# EAGLE board Triple_Axis_Accel-Gyro_Breakout_MPU-6050-Panel-v12 (EAGLE 6.4), part 1 of 3
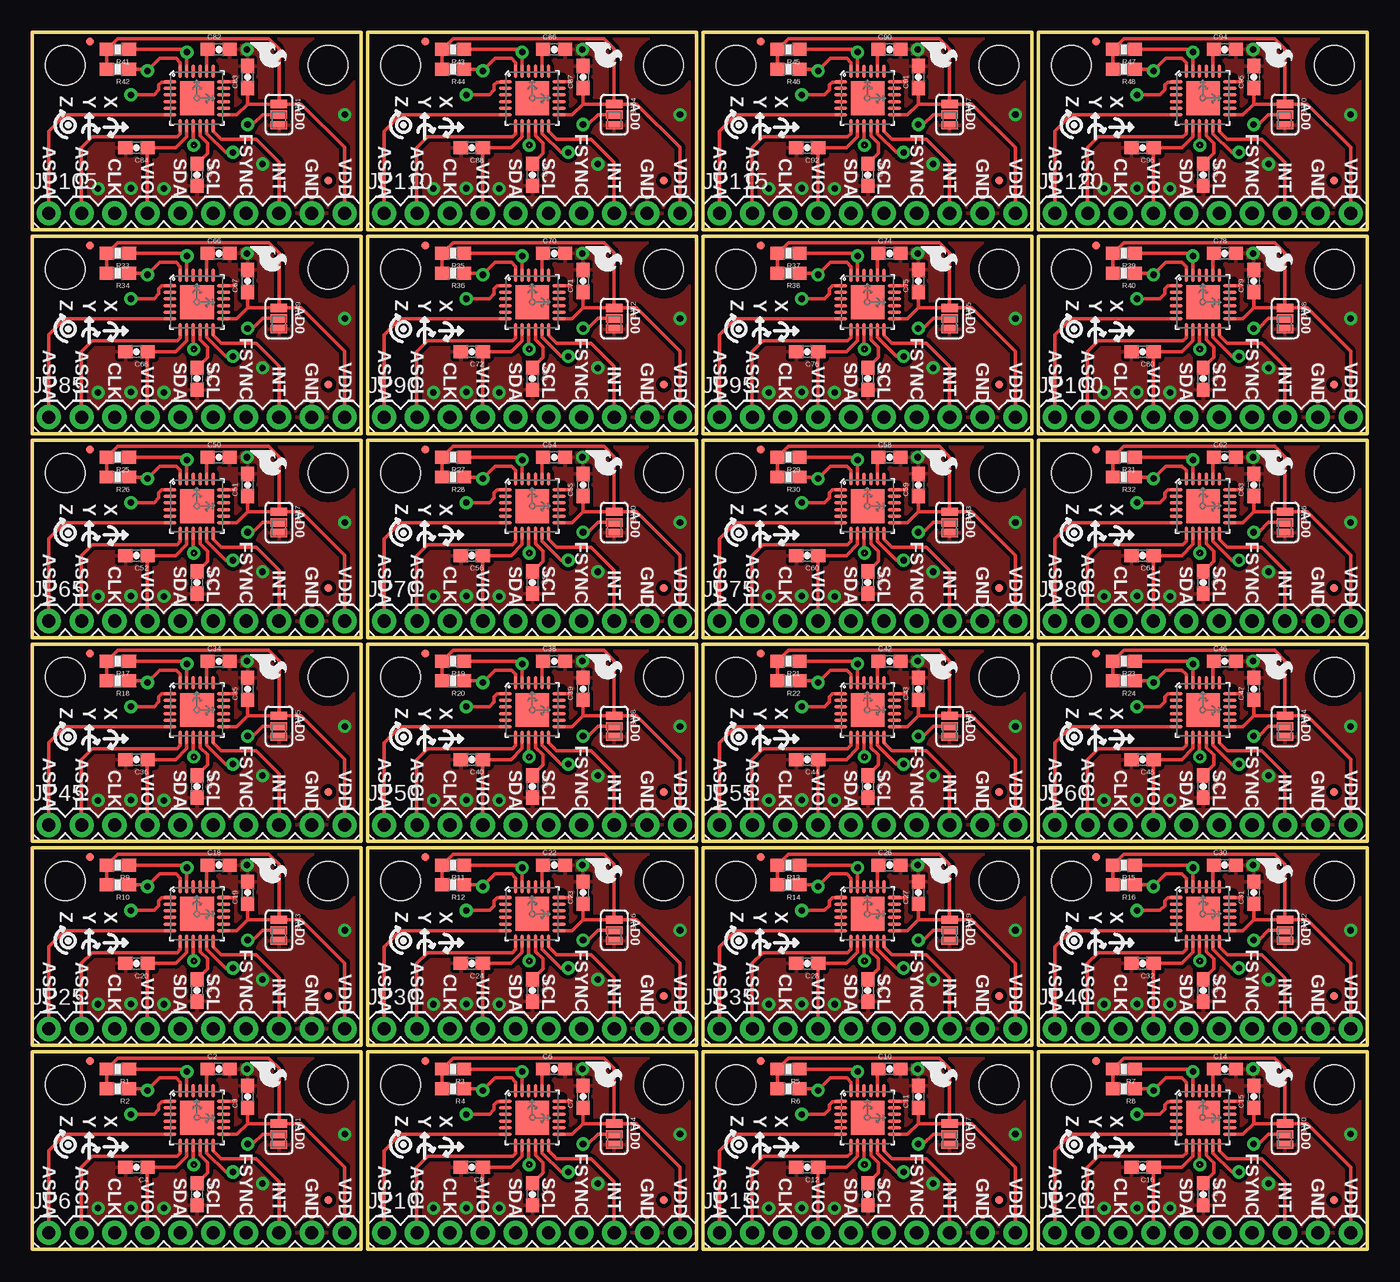
[diagram p0: board, top side]
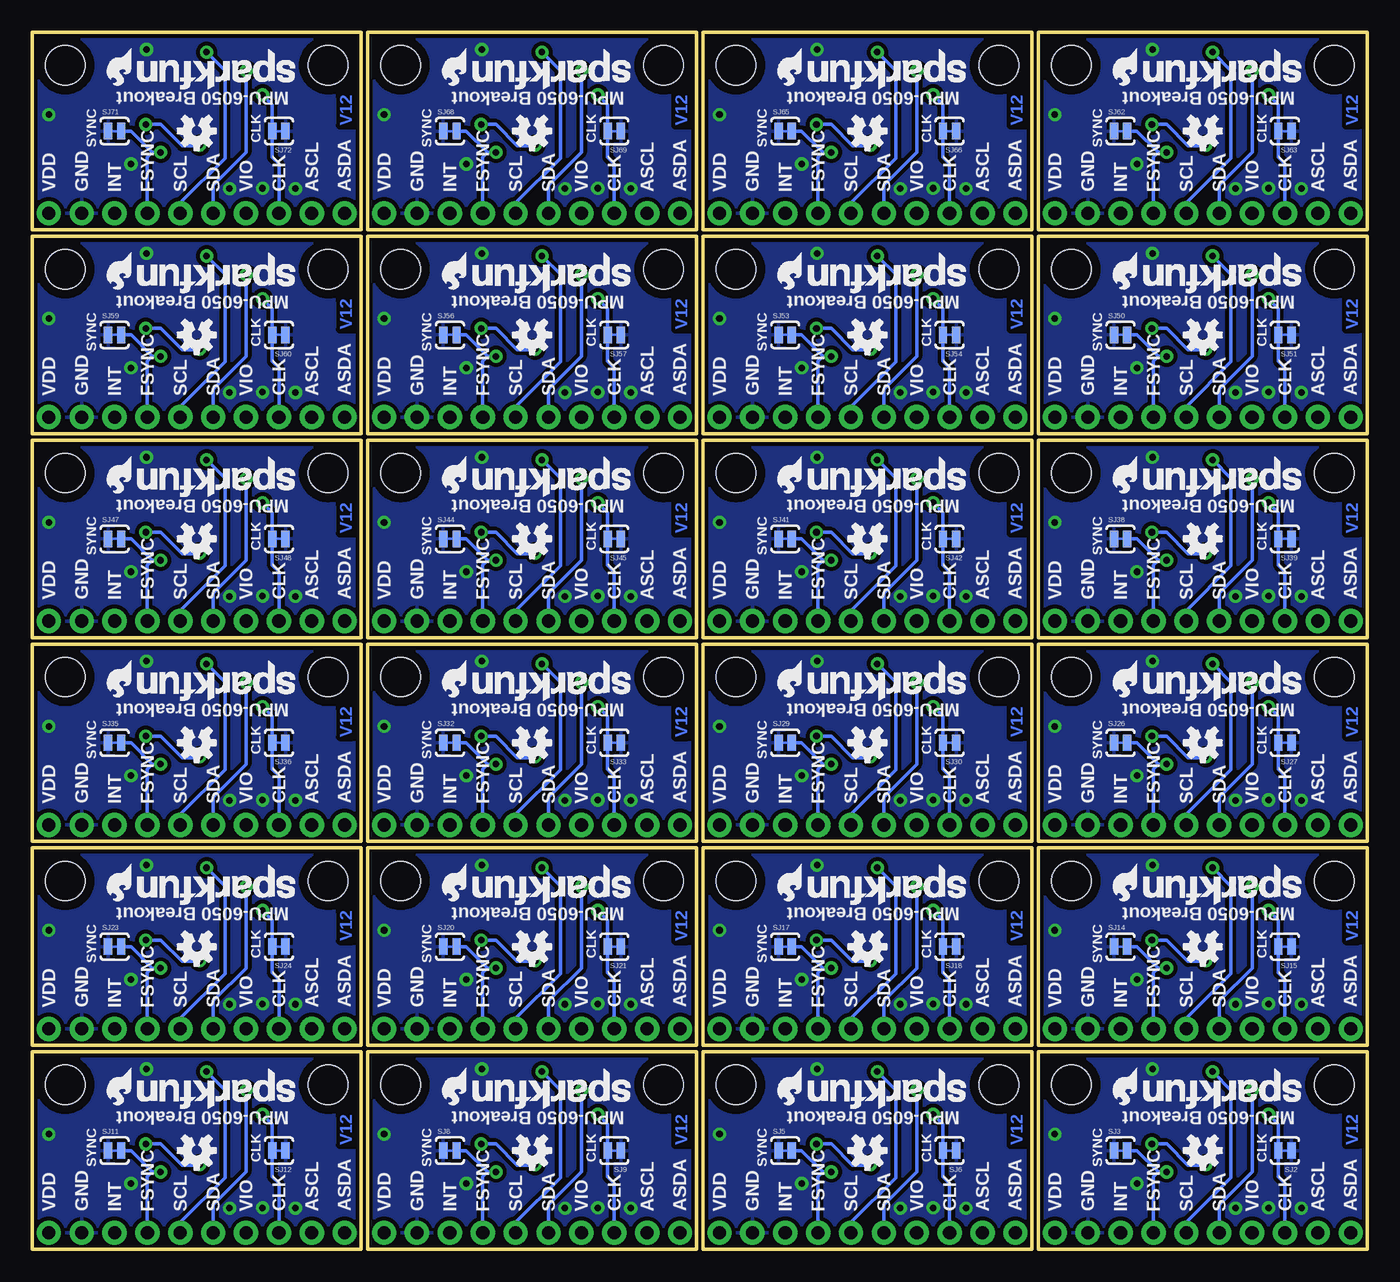
[diagram p1: board, bottom side, seen from below]

Size 103.12 x 93.98 mm. Coordinates in mm from the lower left corner, seen from the top.
Outline: 25.4,0 25.4,15.24 0,15.24 0,0 25.4,0
Outline: 51.31,0 51.31,15.24 25.91,15.24 25.91,0 51.31,0
Outline: 77.22,0 77.22,15.24 51.82,15.24 51.82,0 77.22,0
Outline: 103.12,0 103.12,15.24 77.72,15.24 77.72,0 103.12,0
Outline: 25.4,15.75 25.4,30.99 0,30.99 0,15.75 25.4,15.75
Outline: 51.31,15.75 51.31,30.99 25.91,30.99 25.91,15.75 51.31,15.75
Outline: 77.22,15.75 77.22,30.99 51.82,30.99 51.82,15.75 77.22,15.75
Outline: 103.12,15.75 103.12,30.99 77.72,30.99 77.72,15.75 103.12,15.75
Outline: 25.4,31.5 25.4,46.74 0,46.74 0,31.5 25.4,31.5
Outline: 51.31,31.5 51.31,46.74 25.91,46.74 25.91,31.5 51.31,31.5
Outline: 77.22,31.5 77.22,46.74 51.82,46.74 51.82,31.5 77.22,31.5
Outline: 103.12,31.5 103.12,46.74 77.72,46.74 77.72,31.5 103.12,31.5
Outline: 25.4,47.24 25.4,62.48 0,62.48 0,47.24 25.4,47.24
Outline: 51.31,47.24 51.31,62.48 25.91,62.48 25.91,47.24 51.31,47.24
Outline: 77.22,47.24 77.22,62.48 51.82,62.48 51.82,47.24 77.22,47.24
Outline: 103.12,47.24 103.12,62.48 77.72,62.48 77.72,47.24 103.12,47.24
Outline: 25.4,62.99 25.4,78.23 0,78.23 0,62.99 25.4,62.99
Outline: 51.31,62.99 51.31,78.23 25.91,78.23 25.91,62.99 51.31,62.99
Outline: 77.22,62.99 77.22,78.23 51.82,78.23 51.82,62.99 77.22,62.99
Outline: 103.12,62.99 103.12,78.23 77.72,78.23 77.72,62.99 103.12,62.99
Outline: 25.4,78.74 25.4,93.98 0,93.98 0,78.74 25.4,78.74
Outline: 51.31,78.74 51.31,93.98 25.91,93.98 25.91,78.74 51.31,78.74
Outline: 77.22,78.74 77.22,93.98 51.82,93.98 51.82,78.74 77.22,78.74
Outline: 103.12,78.74 103.12,93.98 77.72,93.98 77.72,78.74 103.12,78.74
Copper layers (1*16): Top 0.035mm / dielectric 1.5mm / Bottom 0.035mm
Design rules "SparkFun *": minimum track width 7mil, minimum drill 15mil, track to track 8mil, track to pad 8mil, pad to pad 8mil, via to via 8mil, smd to smd 8mil, copper to edge 8mil, drill to drill 8mil, minimum pad ring 12mil, minimum via ring 10mil, stop-mask expansion 4mil, vias tented up to drill 20mil, thermal gap 10mil
Net classes: 0 Default: width 0.203 mm; 1 vcc: width 0.254 mm; 2 GND: width 0.813 mm
tRestrict: area 14.5,11.6 to 15.1,11.8; area 40.4,11.6 to 41,11.8; area 66.3,11.6 to 66.9,11.8; area 92.2,11.6 to 92.8,11.8; area 14.5,27.3 to 15.1,27.6; area 40.4,27.3 to 41,27.6; area 66.3,27.3 to 66.9,27.6; area 92.2,27.3 to 92.8,27.6; area 14.5,43.1 to 15.1,43.3; area 40.4,43.1 to 41,43.3; area 66.3,43.1 to 66.9,43.3; area 92.2,43.1 to 92.8,43.3; area 14.5,58.8 to 15.1,59.1; area 40.4,58.8 to 41,59.1; area 66.3,58.8 to 66.9,59.1; area 92.2,58.8 to 92.8,59.1; area 14.5,74.5 to 15.1,74.8; area 40.4,74.5 to 41,74.8; area 66.3,74.5 to 66.9,74.8; area 92.2,74.5 to 92.8,74.8; area 14.5,90.3 to 15.1,90.6; area 40.4,90.3 to 41,90.6; area 66.3,90.3 to 66.9,90.6; area 92.2,90.3 to 92.8,90.6

## Footprints (pad centres in the part's own frame; a part is rotated, then mirrored left to right if it is on the bottom)
0603-CAP = smd 1.1 x 1: 1 -0.85,0; 2 0.85,0
STAND-OFF-TIGHT = hole 3.048: 0,0
MICRO-FIDUCIAL = smd 0.635 x 0.635: 1 0,0
1X10 = drill 1.016 pad 1.88: 1 0,0; 2 2.54,0; 3 5.08,0; 4 7.62,0; 5 10.16,0; 6 12.7,0; 7 15.24,0; 8 17.78,0; 9 20.32,0; 10 22.86,0
0603-RES = smd 1.1 x 1: 1 -0.85,0; 2 0.85,0
SJ_3_PASTE2&3 = smd 0.635 x 1.27: 1 -0.813,0; 2 0,0; 3 0.813,0
SJ_2S-TRACE = smd 0.635 x 1.27: 1 -0.508,0; 2 0.508,0
QFN-24-4MM2 = smd 1.016 x 0.254: 1 -2.066,1.257; 2 -2.066,0.75; 3 -2.066,0.247; 4 -2.066,-0.287; 5 -2.066,-0.792; 6 -2.066,-1.297; 13 2.086,-1.297; 14 2.086,-0.792; 15 2.086,-0.287; 16 2.086,0.247; 17 2.086,0.75; 18 2.086,1.257 | smd 0.254 x 1.016: 7 -1.267,-2.122; 8 -0.762,-2.122; 9 -0.258,-2.122; 10 0.278,-2.122; 11 0.78,-2.122; 12 1.287,-2.122; 19 1.287,2.082; 20 0.78,2.082; 21 0.278,2.082; 22 -0.258,2.082; 23 -0.762,2.082; 24 -1.267,2.082 | smd 2.616 x 2.616: P$1 0.02,-0.01

## Placement (x,y rotation side)
C1  0.1uF  [0603-CAP]  12.73,4.24 270 top
C2  2.2nF  [0603-CAP]  14.4,13.92 0 top
C3  0.1uF  [0603-CAP]  16.64,11.79 90 top
C4  10nF  [0603-CAP]  8.05,6.32 180 top
C5  0.1uF  [0603-CAP]  38.63,4.24 270 top
C6  2.2nF  [0603-CAP]  40.31,13.92 0 top
C7  0.1uF  [0603-CAP]  42.55,11.79 90 top
C8  10nF  [0603-CAP]  33.96,6.32 180 top
C9  0.1uF  [0603-CAP]  64.54,4.24 270 top
C10  2.2nF  [0603-CAP]  66.22,13.92 0 top
C11  0.1uF  [0603-CAP]  68.45,11.79 90 top
C12  10nF  [0603-CAP]  59.87,6.32 180 top
C13  0.1uF  [0603-CAP]  90.45,4.24 270 top
C14  2.2nF  [0603-CAP]  92.13,13.92 0 top
C15  0.1uF  [0603-CAP]  94.36,11.79 90 top
C16  10nF  [0603-CAP]  85.78,6.32 180 top
C17  0.1uF  [0603-CAP]  12.73,19.99 270 top
C18  2.2nF  [0603-CAP]  14.4,29.67 0 top
C19  0.1uF  [0603-CAP]  16.64,27.53 90 top
C20  10nF  [0603-CAP]  8.05,22.07 180 top
C21  0.1uF  [0603-CAP]  38.63,19.99 270 top
C22  2.2nF  [0603-CAP]  40.31,29.67 0 top
C23  0.1uF  [0603-CAP]  42.55,27.53 90 top
C24  10nF  [0603-CAP]  33.96,22.07 180 top
C25  0.1uF  [0603-CAP]  64.54,19.99 270 top
C26  2.2nF  [0603-CAP]  66.22,29.67 0 top
C27  0.1uF  [0603-CAP]  68.45,27.53 90 top
C28  10nF  [0603-CAP]  59.87,22.07 180 top
C29  0.1uF  [0603-CAP]  90.45,19.99 270 top
C30  2.2nF  [0603-CAP]  92.13,29.67 0 top
C31  0.1uF  [0603-CAP]  94.36,27.53 90 top
C32  10nF  [0603-CAP]  85.78,22.07 180 top
C33  0.1uF  [0603-CAP]  12.73,35.74 270 top
C34  2.2nF  [0603-CAP]  14.4,45.42 0 top
C35  0.1uF  [0603-CAP]  16.64,43.28 90 top
C36  10nF  [0603-CAP]  8.05,37.82 180 top
C37  0.1uF  [0603-CAP]  38.63,35.74 270 top
C38  2.2nF  [0603-CAP]  40.31,45.42 0 top
C39  0.1uF  [0603-CAP]  42.55,43.28 90 top
C40  10nF  [0603-CAP]  33.96,37.82 180 top
C41  0.1uF  [0603-CAP]  64.54,35.74 270 top
C42  2.2nF  [0603-CAP]  66.22,45.42 0 top
C43  0.1uF  [0603-CAP]  68.45,43.28 90 top
C44  10nF  [0603-CAP]  59.87,37.82 180 top
C45  0.1uF  [0603-CAP]  90.45,35.74 270 top
C46  2.2nF  [0603-CAP]  92.13,45.42 0 top
C47  0.1uF  [0603-CAP]  94.36,43.28 90 top
C48  10nF  [0603-CAP]  85.78,37.82 180 top
C49  0.1uF  [0603-CAP]  12.73,51.49 270 top
C50  2.2nF  [0603-CAP]  14.4,61.16 0 top
C51  0.1uF  [0603-CAP]  16.64,59.03 90 top
C52  10nF  [0603-CAP]  8.05,53.57 180 top
C53  0.1uF  [0603-CAP]  38.63,51.49 270 top
C54  2.2nF  [0603-CAP]  40.31,61.16 0 top
C55  0.1uF  [0603-CAP]  42.55,59.03 90 top
C56  10nF  [0603-CAP]  33.96,53.57 180 top
C57  0.1uF  [0603-CAP]  64.54,51.49 270 top
C58  2.2nF  [0603-CAP]  66.22,61.16 0 top
C59  0.1uF  [0603-CAP]  68.45,59.03 90 top
C60  10nF  [0603-CAP]  59.87,53.57 180 top
C61  0.1uF  [0603-CAP]  90.45,51.49 270 top
C62  2.2nF  [0603-CAP]  92.13,61.16 0 top
C63  0.1uF  [0603-CAP]  94.36,59.03 90 top
C64  10nF  [0603-CAP]  85.78,53.57 180 top
C65  0.1uF  [0603-CAP]  12.73,67.23 270 top
C66  2.2nF  [0603-CAP]  14.4,76.91 0 top
C67  0.1uF  [0603-CAP]  16.64,74.78 90 top
C68  10nF  [0603-CAP]  8.05,69.32 180 top
C69  0.1uF  [0603-CAP]  38.63,67.23 270 top
C70  2.2nF  [0603-CAP]  40.31,76.91 0 top
C71  0.1uF  [0603-CAP]  42.55,74.78 90 top
C72  10nF  [0603-CAP]  33.96,69.32 180 top
C73  0.1uF  [0603-CAP]  64.54,67.23 270 top
C74  2.2nF  [0603-CAP]  66.22,76.91 0 top
C75  0.1uF  [0603-CAP]  68.45,74.78 90 top
C76  10nF  [0603-CAP]  59.87,69.32 180 top
C77  0.1uF  [0603-CAP]  90.45,67.23 270 top
C78  2.2nF  [0603-CAP]  92.13,76.91 0 top
C79  0.1uF  [0603-CAP]  94.36,74.78 90 top
C80  10nF  [0603-CAP]  85.78,69.32 180 top
C81  0.1uF  [0603-CAP]  12.73,82.98 270 top
C82  2.2nF  [0603-CAP]  14.4,92.66 0 top
C83  0.1uF  [0603-CAP]  16.64,90.53 90 top
C84  10nF  [0603-CAP]  8.05,85.06 180 top
C85  0.1uF  [0603-CAP]  38.63,82.98 270 top
C86  2.2nF  [0603-CAP]  40.31,92.66 0 top
C87  0.1uF  [0603-CAP]  42.55,90.53 90 top
C88  10nF  [0603-CAP]  33.96,85.06 180 top
C89  0.1uF  [0603-CAP]  64.54,82.98 270 top
C90  2.2nF  [0603-CAP]  66.22,92.66 0 top
C91  0.1uF  [0603-CAP]  68.45,90.53 90 top
C92  10nF  [0603-CAP]  59.87,85.06 180 top
C93  0.1uF  [0603-CAP]  90.45,82.98 270 top
C94  2.2nF  [0603-CAP]  92.13,92.66 0 top
C95  0.1uF  [0603-CAP]  94.36,90.53 90 top
C96  10nF  [0603-CAP]  85.78,85.06 180 top
JP1  STAND-OFFTIGHT  [STAND-OFF-TIGHT]  48.77,12.7 270 top
JP2  FIDUCIALUFIDUCIAL  [MICRO-FIDUCIAL]  4.45,14.53 270 top
JP3  STAND-OFFTIGHT  [STAND-OFF-TIGHT]  22.86,12.7 270 top
JP4  STAND-OFFTIGHT  [STAND-OFF-TIGHT]  2.54,12.7 270 top
JP5  FIDUCIALUFIDUCIAL  [MICRO-FIDUCIAL]  22.86,3.81 270 top
JP6  M10"  [1X10]  1.27,1.27 0 top
JP7  STAND-OFFTIGHT  [STAND-OFF-TIGHT]  28.45,12.7 270 top
JP8  FIDUCIALUFIDUCIAL  [MICRO-FIDUCIAL]  30.35,14.53 270 top
JP9  FIDUCIALUFIDUCIAL  [MICRO-FIDUCIAL]  48.77,3.81 270 top
JP10  M10"  [1X10]  27.18,1.27 0 top
JP11  STAND-OFFTIGHT  [STAND-OFF-TIGHT]  74.68,12.7 270 top
JP12  STAND-OFFTIGHT  [STAND-OFF-TIGHT]  54.36,12.7 270 top
JP13  FIDUCIALUFIDUCIAL  [MICRO-FIDUCIAL]  56.26,14.53 270 top
JP14  FIDUCIALUFIDUCIAL  [MICRO-FIDUCIAL]  74.68,3.81 270 top
JP15  M10"  [1X10]  53.09,1.27 0 top
JP16  STAND-OFFTIGHT  [STAND-OFF-TIGHT]  100.58,12.7 270 top
JP17  STAND-OFFTIGHT  [STAND-OFF-TIGHT]  80.26,12.7 270 top
JP18  FIDUCIALUFIDUCIAL  [MICRO-FIDUCIAL]  82.17,14.53 270 top
JP19  FIDUCIALUFIDUCIAL  [MICRO-FIDUCIAL]  100.58,3.81 270 top
JP20  M10"  [1X10]  78.99,1.27 0 top
JP21  STAND-OFFTIGHT  [STAND-OFF-TIGHT]  22.86,28.45 270 top
JP22  STAND-OFFTIGHT  [STAND-OFF-TIGHT]  2.54,28.45 270 top
JP23  FIDUCIALUFIDUCIAL  [MICRO-FIDUCIAL]  4.45,30.28 270 top
JP24  FIDUCIALUFIDUCIAL  [MICRO-FIDUCIAL]  22.86,19.56 270 top
JP25  M10"  [1X10]  1.27,17.02 0 top
JP26  STAND-OFFTIGHT  [STAND-OFF-TIGHT]  48.77,28.45 270 top
JP27  STAND-OFFTIGHT  [STAND-OFF-TIGHT]  28.45,28.45 270 top
JP28  FIDUCIALUFIDUCIAL  [MICRO-FIDUCIAL]  30.35,30.28 270 top
JP29  FIDUCIALUFIDUCIAL  [MICRO-FIDUCIAL]  48.77,19.56 270 top
JP30  M10"  [1X10]  27.18,17.02 0 top
JP31  STAND-OFFTIGHT  [STAND-OFF-TIGHT]  74.68,28.45 270 top
JP32  STAND-OFFTIGHT  [STAND-OFF-TIGHT]  54.36,28.45 270 top
JP33  FIDUCIALUFIDUCIAL  [MICRO-FIDUCIAL]  56.26,30.28 270 top
JP34  FIDUCIALUFIDUCIAL  [MICRO-FIDUCIAL]  74.68,19.56 270 top
JP35  M10"  [1X10]  53.09,17.02 0 top
JP36  STAND-OFFTIGHT  [STAND-OFF-TIGHT]  100.58,28.45 270 top
JP37  STAND-OFFTIGHT  [STAND-OFF-TIGHT]  80.26,28.45 270 top
JP38  FIDUCIALUFIDUCIAL  [MICRO-FIDUCIAL]  82.17,30.28 270 top
JP39  FIDUCIALUFIDUCIAL  [MICRO-FIDUCIAL]  100.58,19.56 270 top
JP40  M10"  [1X10]  78.99,17.02 0 top
JP41  STAND-OFFTIGHT  [STAND-OFF-TIGHT]  22.86,44.2 270 top
JP42  STAND-OFFTIGHT  [STAND-OFF-TIGHT]  2.54,44.2 270 top
JP43  FIDUCIALUFIDUCIAL  [MICRO-FIDUCIAL]  4.45,46.02 270 top
JP44  FIDUCIALUFIDUCIAL  [MICRO-FIDUCIAL]  22.86,35.31 270 top
JP45  M10"  [1X10]  1.27,32.77 0 top
JP46  STAND-OFFTIGHT  [STAND-OFF-TIGHT]  48.77,44.2 270 top
JP47  STAND-OFFTIGHT  [STAND-OFF-TIGHT]  28.45,44.2 270 top
JP48  FIDUCIALUFIDUCIAL  [MICRO-FIDUCIAL]  30.35,46.02 270 top
JP49  FIDUCIALUFIDUCIAL  [MICRO-FIDUCIAL]  48.77,35.31 270 top
JP50  M10"  [1X10]  27.18,32.77 0 top
JP51  STAND-OFFTIGHT  [STAND-OFF-TIGHT]  74.68,44.2 270 top
JP52  STAND-OFFTIGHT  [STAND-OFF-TIGHT]  54.36,44.2 270 top
JP53  FIDUCIALUFIDUCIAL  [MICRO-FIDUCIAL]  56.26,46.02 270 top
JP54  FIDUCIALUFIDUCIAL  [MICRO-FIDUCIAL]  74.68,35.31 270 top
JP55  M10"  [1X10]  53.09,32.77 0 top
JP56  STAND-OFFTIGHT  [STAND-OFF-TIGHT]  100.58,44.2 270 top
JP57  STAND-OFFTIGHT  [STAND-OFF-TIGHT]  80.26,44.2 270 top
JP58  FIDUCIALUFIDUCIAL  [MICRO-FIDUCIAL]  82.17,46.02 270 top
JP59  FIDUCIALUFIDUCIAL  [MICRO-FIDUCIAL]  100.58,35.31 270 top
JP60  M10"  [1X10]  78.99,32.77 0 top
JP61  STAND-OFFTIGHT  [STAND-OFF-TIGHT]  22.86,59.94 270 top
JP62  STAND-OFFTIGHT  [STAND-OFF-TIGHT]  2.54,59.94 270 top
JP63  FIDUCIALUFIDUCIAL  [MICRO-FIDUCIAL]  4.45,61.77 270 top
JP64  FIDUCIALUFIDUCIAL  [MICRO-FIDUCIAL]  22.86,51.05 270 top
JP65  M10"  [1X10]  1.27,48.51 0 top
JP66  STAND-OFFTIGHT  [STAND-OFF-TIGHT]  48.77,59.94 270 top
JP67  STAND-OFFTIGHT  [STAND-OFF-TIGHT]  28.45,59.94 270 top
JP68  FIDUCIALUFIDUCIAL  [MICRO-FIDUCIAL]  30.35,61.77 270 top
JP69  FIDUCIALUFIDUCIAL  [MICRO-FIDUCIAL]  48.77,51.05 270 top
JP70  M10"  [1X10]  27.18,48.51 0 top
JP71  STAND-OFFTIGHT  [STAND-OFF-TIGHT]  74.68,59.94 270 top
JP72  STAND-OFFTIGHT  [STAND-OFF-TIGHT]  54.36,59.94 270 top
JP73  FIDUCIALUFIDUCIAL  [MICRO-FIDUCIAL]  56.26,61.77 270 top
JP74  FIDUCIALUFIDUCIAL  [MICRO-FIDUCIAL]  74.68,51.05 270 top
JP75  M10"  [1X10]  53.09,48.51 0 top
JP76  STAND-OFFTIGHT  [STAND-OFF-TIGHT]  100.58,59.94 270 top
JP77  STAND-OFFTIGHT  [STAND-OFF-TIGHT]  80.26,59.94 270 top
JP78  FIDUCIALUFIDUCIAL  [MICRO-FIDUCIAL]  82.17,61.77 270 top
JP79  FIDUCIALUFIDUCIAL  [MICRO-FIDUCIAL]  100.58,51.05 270 top
JP80  M10"  [1X10]  78.99,48.51 0 top
JP81  STAND-OFFTIGHT  [STAND-OFF-TIGHT]  22.86,75.69 270 top
JP82  STAND-OFFTIGHT  [STAND-OFF-TIGHT]  2.54,75.69 270 top
JP83  FIDUCIALUFIDUCIAL  [MICRO-FIDUCIAL]  4.45,77.52 270 top
JP84  FIDUCIALUFIDUCIAL  [MICRO-FIDUCIAL]  22.86,66.8 270 top
JP85  M10"  [1X10]  1.27,64.26 0 top
JP86  STAND-OFFTIGHT  [STAND-OFF-TIGHT]  48.77,75.69 270 top
JP87  STAND-OFFTIGHT  [STAND-OFF-TIGHT]  28.45,75.69 270 top
JP88  FIDUCIALUFIDUCIAL  [MICRO-FIDUCIAL]  30.35,77.52 270 top
JP89  FIDUCIALUFIDUCIAL  [MICRO-FIDUCIAL]  48.77,66.8 270 top
JP90  M10"  [1X10]  27.18,64.26 0 top
JP91  STAND-OFFTIGHT  [STAND-OFF-TIGHT]  74.68,75.69 270 top
JP92  STAND-OFFTIGHT  [STAND-OFF-TIGHT]  54.36,75.69 270 top
JP93  FIDUCIALUFIDUCIAL  [MICRO-FIDUCIAL]  56.26,77.52 270 top
JP94  FIDUCIALUFIDUCIAL  [MICRO-FIDUCIAL]  74.68,66.8 270 top
JP95  M10"  [1X10]  53.09,64.26 0 top
JP96  STAND-OFFTIGHT  [STAND-OFF-TIGHT]  100.58,75.69 270 top
JP97  STAND-OFFTIGHT  [STAND-OFF-TIGHT]  80.26,75.69 270 top
JP98  FIDUCIALUFIDUCIAL  [MICRO-FIDUCIAL]  82.17,77.52 270 top
JP99  FIDUCIALUFIDUCIAL  [MICRO-FIDUCIAL]  100.58,66.8 270 top
JP100  M10"  [1X10]  78.99,64.26 0 top
JP101  STAND-OFFTIGHT  [STAND-OFF-TIGHT]  22.86,91.44 270 top
JP102  STAND-OFFTIGHT  [STAND-OFF-TIGHT]  2.54,91.44 270 top
JP103  FIDUCIALUFIDUCIAL  [MICRO-FIDUCIAL]  4.45,93.27 270 top
JP104  FIDUCIALUFIDUCIAL  [MICRO-FIDUCIAL]  22.86,82.55 270 top
JP105  M10"  [1X10]  1.27,80.01 0 top
JP106  STAND-OFFTIGHT  [STAND-OFF-TIGHT]  48.77,91.44 270 top
JP107  STAND-OFFTIGHT  [STAND-OFF-TIGHT]  28.45,91.44 270 top
JP108  FIDUCIALUFIDUCIAL  [MICRO-FIDUCIAL]  30.35,93.27 270 top
JP109  FIDUCIALUFIDUCIAL  [MICRO-FIDUCIAL]  48.77,82.55 270 top
JP110  M10"  [1X10]  27.18,80.01 0 top
JP111  STAND-OFFTIGHT  [STAND-OFF-TIGHT]  74.68,91.44 270 top
JP112  STAND-OFFTIGHT  [STAND-OFF-TIGHT]  54.36,91.44 270 top
JP113  FIDUCIALUFIDUCIAL  [MICRO-FIDUCIAL]  56.26,93.27 270 top
JP114  FIDUCIALUFIDUCIAL  [MICRO-FIDUCIAL]  74.68,82.55 270 top
JP115  M10"  [1X10]  53.09,80.01 0 top
JP116  STAND-OFFTIGHT  [STAND-OFF-TIGHT]  100.58,91.44 270 top
JP117  STAND-OFFTIGHT  [STAND-OFF-TIGHT]  80.26,91.44 270 top
JP118  FIDUCIALUFIDUCIAL  [MICRO-FIDUCIAL]  82.17,93.27 270 top
JP119  FIDUCIALUFIDUCIAL  [MICRO-FIDUCIAL]  100.58,82.55 270 top
JP120  M10"  [1X10]  78.99,80.01 0 top
R1  10k  [0603-RES]  6.6,13.92 180 top
R2  10k  [0603-RES]  6.6,12.4 180 top
R3  10k  [0603-RES]  32.51,13.92 180 top
R4  10k  [0603-RES]  32.51,12.4 180 top
R5  10k  [0603-RES]  58.42,13.92 180 top
R6  10k  [0603-RES]  58.42,12.4 180 top
R7  10k  [0603-RES]  84.33,13.92 180 top
R8  10k  [0603-RES]  84.33,12.4 180 top
R9  10k  [0603-RES]  6.6,29.67 180 top
R10  10k  [0603-RES]  6.6,28.14 180 top
R11  10k  [0603-RES]  32.51,29.67 180 top
R12  10k  [0603-RES]  32.51,28.14 180 top
R13  10k  [0603-RES]  58.42,29.67 180 top
R14  10k  [0603-RES]  58.42,28.14 180 top
R15  10k  [0603-RES]  84.33,29.67 180 top
R16  10k  [0603-RES]  84.33,28.14 180 top
R17  10k  [0603-RES]  6.6,45.42 180 top
R18  10k  [0603-RES]  6.6,43.89 180 top
R19  10k  [0603-RES]  32.51,45.42 180 top
R20  10k  [0603-RES]  32.51,43.89 180 top
R21  10k  [0603-RES]  58.42,45.42 180 top
R22  10k  [0603-RES]  58.42,43.89 180 top
R23  10k  [0603-RES]  84.33,45.42 180 top
R24  10k  [0603-RES]  84.33,43.89 180 top
R25  10k  [0603-RES]  6.6,61.16 180 top
R26  10k  [0603-RES]  6.6,59.64 180 top
R27  10k  [0603-RES]  32.51,61.16 180 top
R28  10k  [0603-RES]  32.51,59.64 180 top
R29  10k  [0603-RES]  58.42,61.16 180 top
R30  10k  [0603-RES]  58.42,59.64 180 top
R31  10k  [0603-RES]  84.33,61.16 180 top
R32  10k  [0603-RES]  84.33,59.64 180 top
R33  10k  [0603-RES]  6.6,76.91 180 top
R34  10k  [0603-RES]  6.6,75.39 180 top
R35  10k  [0603-RES]  32.51,76.91 180 top
R36  10k  [0603-RES]  32.51,75.39 180 top
R37  10k  [0603-RES]  58.42,76.91 180 top
R38  10k  [0603-RES]  58.42,75.39 180 top
R39  10k  [0603-RES]  84.33,76.91 180 top
R40  10k  [0603-RES]  84.33,75.39 180 top
R41  10k  [0603-RES]  6.6,92.66 180 top
R42  10k  [0603-RES]  6.6,91.14 180 top
R43  10k  [0603-RES]  32.51,92.66 180 top
R44  10k  [0603-RES]  32.51,91.14 180 top
R45  10k  [0603-RES]  58.42,92.66 180 top
R46  10k  [0603-RES]  58.42,91.14 180 top
R47  10k  [0603-RES]  84.33,92.66 180 top
R48  10k  [0603-RES]  84.33,91.14 180 top
SJ1  [SJ_3_PASTE2&3]  19.05,8.89 270 top
SJ2  [SJ_2S-TRACE]  6.35,7.62 180 bottom
SJ3  [SJ_2S-TRACE]  19.05,7.62 0 bottom
SJ4  [SJ_3_PASTE2&3]  44.96,8.89 270 top
SJ5  [SJ_2S-TRACE]  44.96,7.62 0 bottom
SJ6  [SJ_2S-TRACE]  32.26,7.62 180 bottom
SJ7  [SJ_3_PASTE2&3]  70.87,8.89 270 top
SJ8  [SJ_2S-TRACE]  70.87,7.62 0 bottom
SJ9  [SJ_2S-TRACE]  58.17,7.62 180 bottom
SJ10  [SJ_3_PASTE2&3]  96.77,8.89 270 top
SJ11  [SJ_2S-TRACE]  96.77,7.62 0 bottom
SJ12  [SJ_2S-TRACE]  84.07,7.62 180 bottom
SJ13  [SJ_3_PASTE2&3]  19.05,24.64 270 top
SJ14  [SJ_2S-TRACE]  19.05,23.37 0 bottom
SJ15  [SJ_2S-TRACE]  6.35,23.37 180 bottom
SJ16  [SJ_3_PASTE2&3]  44.96,24.64 270 top
SJ17  [SJ_2S-TRACE]  44.96,23.37 0 bottom
SJ18  [SJ_2S-TRACE]  32.26,23.37 180 bottom
SJ19  [SJ_3_PASTE2&3]  70.87,24.64 270 top
SJ20  [SJ_2S-TRACE]  70.87,23.37 0 bottom
SJ21  [SJ_2S-TRACE]  58.17,23.37 180 bottom
SJ22  [SJ_3_PASTE2&3]  96.77,24.64 270 top
SJ23  [SJ_2S-TRACE]  96.77,23.37 0 bottom
SJ24  [SJ_2S-TRACE]  84.07,23.37 180 bottom
SJ25  [SJ_3_PASTE2&3]  19.05,40.39 270 top
SJ26  [SJ_2S-TRACE]  19.05,39.12 0 bottom
SJ27  [SJ_2S-TRACE]  6.35,39.12 180 bottom
SJ28  [SJ_3_PASTE2&3]  44.96,40.39 270 top
SJ29  [SJ_2S-TRACE]  44.96,39.12 0 bottom
SJ30  [SJ_2S-TRACE]  32.26,39.12 180 bottom
SJ31  [SJ_3_PASTE2&3]  70.87,40.39 270 top
SJ32  [SJ_2S-TRACE]  70.87,39.12 0 bottom
SJ33  [SJ_2S-TRACE]  58.17,39.12 180 bottom
SJ34  [SJ_3_PASTE2&3]  96.77,40.39 270 top
SJ35  [SJ_2S-TRACE]  96.77,39.12 0 bottom
SJ36  [SJ_2S-TRACE]  84.07,39.12 180 bottom
SJ37  [SJ_3_PASTE2&3]  19.05,56.13 270 top
SJ38  [SJ_2S-TRACE]  19.05,54.86 0 bottom
SJ39  [SJ_2S-TRACE]  6.35,54.86 180 bottom
SJ40  [SJ_3_PASTE2&3]  44.96,56.13 270 top
SJ41  [SJ_2S-TRACE]  44.96,54.86 0 bottom
SJ42  [SJ_2S-TRACE]  32.26,54.86 180 bottom
SJ43  [SJ_3_PASTE2&3]  70.87,56.13 270 top
SJ44  [SJ_2S-TRACE]  70.87,54.86 0 bottom
SJ45  [SJ_2S-TRACE]  58.17,54.86 180 bottom
SJ46  [SJ_3_PASTE2&3]  96.77,56.13 270 top
SJ47  [SJ_2S-TRACE]  96.77,54.86 0 bottom
SJ48  [SJ_2S-TRACE]  84.07,54.86 180 bottom
SJ49  [SJ_3_PASTE2&3]  19.05,71.88 270 top
SJ50  [SJ_2S-TRACE]  19.05,70.61 0 bottom
SJ51  [SJ_2S-TRACE]  6.35,70.61 180 bottom
SJ52  [SJ_3_PASTE2&3]  44.96,71.88 270 top
SJ53  [SJ_2S-TRACE]  44.96,70.61 0 bottom
SJ54  [SJ_2S-TRACE]  32.26,70.61 180 bottom
SJ55  [SJ_3_PASTE2&3]  70.87,71.88 270 top
SJ56  [SJ_2S-TRACE]  70.87,70.61 0 bottom
SJ57  [SJ_2S-TRACE]  58.17,70.61 180 bottom
SJ58  [SJ_3_PASTE2&3]  96.77,71.88 270 top
SJ59  [SJ_2S-TRACE]  96.77,70.61 0 bottom
SJ60  [SJ_2S-TRACE]  84.07,70.61 180 bottom
SJ61  [SJ_3_PASTE2&3]  19.05,87.63 270 top
SJ62  [SJ_2S-TRACE]  19.05,86.36 0 bottom
SJ63  [SJ_2S-TRACE]  6.35,86.36 180 bottom
SJ64  [SJ_3_PASTE2&3]  44.96,87.63 270 top
SJ65  [SJ_2S-TRACE]  44.96,86.36 0 bottom
SJ66  [SJ_2S-TRACE]  32.26,86.36 180 bottom
SJ67  [SJ_3_PASTE2&3]  70.87,87.63 270 top
SJ68  [SJ_2S-TRACE]  70.87,86.36 0 bottom
SJ69  [SJ_2S-TRACE]  58.17,86.36 180 bottom
SJ70  [SJ_3_PASTE2&3]  96.77,87.63 270 top
SJ71  [SJ_2S-TRACE]  96.77,86.36 0 bottom
SJ72  [SJ_2S-TRACE]  84.07,86.36 180 bottom
U1  MPU-6050-1  [QFN-24-4MM2]  12.7,10.16 0 top
U2  MPU-6050-1  [QFN-24-4MM2]  38.61,10.16 0 top
U3  MPU-6050-1  [QFN-24-4MM2]  64.52,10.16 0 top
U4  MPU-6050-1  [QFN-24-4MM2]  90.42,10.16 0 top
U5  MPU-6050-1  [QFN-24-4MM2]  12.7,25.91 0 top
U6  MPU-6050-1  [QFN-24-4MM2]  38.61,25.91 0 top
U7  MPU-6050-1  [QFN-24-4MM2]  64.52,25.91 0 top
U8  MPU-6050-1  [QFN-24-4MM2]  90.42,25.91 0 top
U9  MPU-6050-1  [QFN-24-4MM2]  12.7,41.66 0 top
U10  MPU-6050-1  [QFN-24-4MM2]  38.61,41.66 0 top
U11  MPU-6050-1  [QFN-24-4MM2]  64.52,41.66 0 top
U12  MPU-6050-1  [QFN-24-4MM2]  90.42,41.66 0 top
U13  MPU-6050-1  [QFN-24-4MM2]  12.7,57.4 0 top
U14  MPU-6050-1  [QFN-24-4MM2]  38.61,57.4 0 top
U15  MPU-6050-1  [QFN-24-4MM2]  64.52,57.4 0 top
U16  MPU-6050-1  [QFN-24-4MM2]  90.42,57.4 0 top
U17  MPU-6050-1  [QFN-24-4MM2]  12.7,73.15 0 top
U18  MPU-6050-1  [QFN-24-4MM2]  38.61,73.15 0 top
U19  MPU-6050-1  [QFN-24-4MM2]  64.52,73.15 0 top
U20  MPU-6050-1  [QFN-24-4MM2]  90.42,73.15 0 top
U21  MPU-6050-1  [QFN-24-4MM2]  12.7,88.9 0 top
U22  MPU-6050-1  [QFN-24-4MM2]  38.61,88.9 0 top
U23  MPU-6050-1  [QFN-24-4MM2]  64.52,88.9 0 top
U24  MPU-6050-1  [QFN-24-4MM2]  90.42,88.9 0 top
U$1  OSHW-LOGOS  [OSHW-LOGO-S]  12.7,7.62 180 bottom
U$2  [SFE-LOGO-FLAME]  16.84,14.43 270 top
U$3  [SFE-LOGO-FLAME]  17.78,13.97 180 bottom
U$4  [SFE-NEW-WEB]  5.08,13.97 180 bottom
U$5  [SFE-LOGO-FLAME]  43.69,13.97 180 bottom
U$6  OSHW-LOGOS  [OSHW-LOGO-S]  38.61,7.62 180 bottom
U$7  [SFE-LOGO-FLAME]  42.75,14.43 270 top
U$8  [SFE-NEW-WEB]  30.99,13.97 180 bottom
U$9  [SFE-LOGO-FLAME]  69.6,13.97 180 bottom
U$10  OSHW-LOGOS  [OSHW-LOGO-S]  64.52,7.62 180 bottom
U$11  [SFE-LOGO-FLAME]  68.66,14.43 270 top
U$12  [SFE-NEW-WEB]  56.9,13.97 180 bottom
U$13  [SFE-LOGO-FLAME]  95.5,13.97 180 bottom
U$14  OSHW-LOGOS  [OSHW-LOGO-S]  90.42,7.62 180 bottom
U$15  [SFE-LOGO-FLAME]  94.56,14.43 270 top
U$16  [SFE-NEW-WEB]  82.8,13.97 180 bottom
U$17  [SFE-LOGO-FLAME]  17.78,29.72 180 bottom
U$18  OSHW-LOGOS  [OSHW-LOGO-S]  12.7,23.37 180 bottom
U$19  [SFE-LOGO-FLAME]  16.84,30.18 270 top
U$20  [SFE-NEW-WEB]  5.08,29.72 180 bottom
U$21  [SFE-LOGO-FLAME]  43.69,29.72 180 bottom
U$22  OSHW-LOGOS  [OSHW-LOGO-S]  38.61,23.37 180 bottom
U$23  [SFE-LOGO-FLAME]  42.75,30.18 270 top
U$24  [SFE-NEW-WEB]  30.99,29.72 180 bottom
U$25  [SFE-LOGO-FLAME]  69.6,29.72 180 bottom
U$26  OSHW-LOGOS  [OSHW-LOGO-S]  64.52,23.37 180 bottom
U$27  [SFE-LOGO-FLAME]  68.66,30.18 270 top
U$28  [SFE-NEW-WEB]  56.9,29.72 180 bottom
U$29  [SFE-LOGO-FLAME]  95.5,29.72 180 bottom
U$30  OSHW-LOGOS  [OSHW-LOGO-S]  90.42,23.37 180 bottom
U$31  [SFE-LOGO-FLAME]  94.56,30.18 270 top
U$32  [SFE-NEW-WEB]  82.8,29.72 180 bottom
U$33  [SFE-LOGO-FLAME]  17.78,45.47 180 bottom
U$34  OSHW-LOGOS  [OSHW-LOGO-S]  12.7,39.12 180 bottom
U$35  [SFE-LOGO-FLAME]  16.84,45.92 270 top
U$36  [SFE-NEW-WEB]  5.08,45.47 180 bottom
U$37  [SFE-LOGO-FLAME]  43.69,45.47 180 bottom
U$38  OSHW-LOGOS  [OSHW-LOGO-S]  38.61,39.12 180 bottom
U$39  [SFE-LOGO-FLAME]  42.75,45.92 270 top
U$40  [SFE-NEW-WEB]  30.99,45.47 180 bottom
U$41  [SFE-LOGO-FLAME]  69.6,45.47 180 bottom
U$42  OSHW-LOGOS  [OSHW-LOGO-S]  64.52,39.12 180 bottom
U$43  [SFE-LOGO-FLAME]  68.66,45.92 270 top
U$44  [SFE-NEW-WEB]  56.9,45.47 180 bottom
U$45  [SFE-LOGO-FLAME]  95.5,45.47 180 bottom
U$46  OSHW-LOGOS  [OSHW-LOGO-S]  90.42,39.12 180 bottom
U$47  [SFE-LOGO-FLAME]  94.56,45.92 270 top
U$48  [SFE-NEW-WEB]  82.8,45.47 180 bottom
U$49  [SFE-LOGO-FLAME]  17.78,61.21 180 bottom
U$50  OSHW-LOGOS  [OSHW-LOGO-S]  12.7,54.86 180 bottom
U$51  [SFE-LOGO-FLAME]  16.84,61.67 270 top
U$52  [SFE-NEW-WEB]  5.08,61.21 180 bottom
U$53  [SFE-LOGO-FLAME]  43.69,61.21 180 bottom
U$54  OSHW-LOGOS  [OSHW-LOGO-S]  38.61,54.86 180 bottom
U$55  [SFE-LOGO-FLAME]  42.75,61.67 270 top
U$56  [SFE-NEW-WEB]  30.99,61.21 180 bottom
U$57  [SFE-LOGO-FLAME]  69.6,61.21 180 bottom
U$58  OSHW-LOGOS  [OSHW-LOGO-S]  64.52,54.86 180 bottom
U$59  [SFE-LOGO-FLAME]  68.66,61.67 270 top
U$60  [SFE-NEW-WEB]  56.9,61.21 180 bottom
U$61  [SFE-LOGO-FLAME]  95.5,61.21 180 bottom
U$62  OSHW-LOGOS  [OSHW-LOGO-S]  90.42,54.86 180 bottom
U$63  [SFE-LOGO-FLAME]  94.56,61.67 270 top
U$64  [SFE-NEW-WEB]  82.8,61.21 180 bottom
U$65  [SFE-LOGO-FLAME]  17.78,76.96 180 bottom
U$66  OSHW-LOGOS  [OSHW-LOGO-S]  12.7,70.61 180 bottom
U$67  [SFE-LOGO-FLAME]  16.84,77.42 270 top
U$68  [SFE-NEW-WEB]  5.08,76.96 180 bottom
U$69  [SFE-LOGO-FLAME]  43.69,76.96 180 bottom
U$70  OSHW-LOGOS  [OSHW-LOGO-S]  38.61,70.61 180 bottom
U$71  [SFE-LOGO-FLAME]  42.75,77.42 270 top
U$72  [SFE-NEW-WEB]  30.99,76.96 180 bottom
U$73  [SFE-LOGO-FLAME]  69.6,76.96 180 bottom
U$74  OSHW-LOGOS  [OSHW-LOGO-S]  64.52,70.61 180 bottom
U$75  [SFE-LOGO-FLAME]  68.66,77.42 270 top
U$76  [SFE-NEW-WEB]  56.9,76.96 180 bottom
U$77  [SFE-LOGO-FLAME]  95.5,76.96 180 bottom
U$78  OSHW-LOGOS  [OSHW-LOGO-S]  90.42,70.61 180 bottom
U$79  [SFE-LOGO-FLAME]  94.56,77.42 270 top
U$80  [SFE-NEW-WEB]  82.8,76.96 180 bottom
U$81  [SFE-LOGO-FLAME]  17.78,92.71 180 bottom
U$82  OSHW-LOGOS  [OSHW-LOGO-S]  12.7,86.36 180 bottom
U$83  [SFE-LOGO-FLAME]  16.84,93.17 270 top
U$84  [SFE-NEW-WEB]  5.08,92.71 180 bottom
U$85  [SFE-LOGO-FLAME]  43.69,92.71 180 bottom
U$86  OSHW-LOGOS  [OSHW-LOGO-S]  38.61,86.36 180 bottom
U$87  [SFE-LOGO-FLAME]  42.75,93.17 270 top
U$88  [SFE-NEW-WEB]  30.99,92.71 180 bottom
U$89  [SFE-LOGO-FLAME]  69.6,92.71 180 bottom
U$90  OSHW-LOGOS  [OSHW-LOGO-S]  64.52,86.36 180 bottom
U$91  [SFE-LOGO-FLAME]  68.66,93.17 270 top
U$92  [SFE-NEW-WEB]  56.9,92.71 180 bottom
U$93  [SFE-LOGO-FLAME]  95.5,92.71 180 bottom
U$94  OSHW-LOGOS  [OSHW-LOGO-S]  90.42,86.36 180 bottom
U$95  [SFE-LOGO-FLAME]  94.56,93.17 270 top
U$96  [SFE-NEW-WEB]  82.8,92.71 180 bottom

## Library data of the parts
C1-C96 JP1-JP120 R1-R48 SJ1-SJ72 U$1-U$96 = SparkFun
U1-U24 = Testing

## Nets
AUX_SCL: JP6.2 U1.7
AUX_SCL1: JP10.2 U2.7
AUX_SCL2: JP15.2 U3.7
AUX_SCL3: JP20.2 U4.7
AUX_SCL4: JP25.2 U5.7
AUX_SCL5: JP30.2 U6.7
AUX_SCL6: JP35.2 U7.7
AUX_SCL7: JP40.2 U8.7
AUX_SCL8: JP45.2 U9.7
AUX_SCL9: JP50.2 U10.7
AUX_SCL10: JP55.2 U11.7
AUX_SCL11: JP60.2 U12.7
AUX_SCL12: JP65.2 U13.7
AUX_SCL13: JP70.2 U14.7
AUX_SCL14: JP75.2 U15.7
AUX_SCL15: JP80.2 U16.7
AUX_SCL16: JP85.2 U17.7
AUX_SCL17: JP90.2 U18.7
AUX_SCL18: JP95.2 U19.7
AUX_SCL19: JP100.2 U20.7
AUX_SCL20: JP105.2 U21.7
AUX_SCL21: JP110.2 U22.7
AUX_SCL22: JP115.2 U23.7
AUX_SCL23: JP120.2 U24.7
AUX_SDA: JP6.1 U1.6
AUX_SDA1: JP10.1 U2.6
AUX_SDA2: JP15.1 U3.6
AUX_SDA3: JP20.1 U4.6
AUX_SDA4: JP25.1 U5.6
AUX_SDA5: JP30.1 U6.6
AUX_SDA6: JP35.1 U7.6
AUX_SDA7: JP40.1 U8.6
AUX_SDA8: JP45.1 U9.6
AUX_SDA9: JP50.1 U10.6
AUX_SDA10: JP55.1 U11.6
AUX_SDA11: JP60.1 U12.6
AUX_SDA12: JP65.1 U13.6
AUX_SDA13: JP70.1 U14.6
AUX_SDA14: JP75.1 U15.6
AUX_SDA15: JP80.1 U16.6
AUX_SDA16: JP85.1 U17.6
AUX_SDA17: JP90.1 U18.6
AUX_SDA18: JP95.1 U19.6
AUX_SDA19: JP100.1 U20.6
AUX_SDA20: JP105.1 U21.6
AUX_SDA21: JP110.1 U22.6
AUX_SDA22: JP115.1 U23.6
AUX_SDA23: JP120.1 U24.6
CLKIN: JP6.3 SJ2.2 U1.1
CLKIN1: JP10.3 SJ6.2 U2.1
CLKIN2: JP15.3 SJ9.2 U3.1
CLKIN3: JP20.3 SJ12.2 U4.1
CLKIN4: JP25.3 SJ15.2 U5.1
CLKIN5: JP30.3 SJ18.2 U6.1
CLKIN6: JP35.3 SJ21.2 U7.1
CLKIN7: JP40.3 SJ24.2 U8.1
CLKIN8: JP45.3 SJ27.2 U9.1
CLKIN9: JP50.3 SJ30.2 U10.1
CLKIN10: JP55.3 SJ33.2 U11.1
CLKIN11: JP60.3 SJ36.2 U12.1
CLKIN12: JP65.3 SJ39.2 U13.1
CLKIN13: JP70.3 SJ42.2 U14.1
CLKIN14: JP75.3 SJ45.2 U15.1
CLKIN15: JP80.3 SJ48.2 U16.1
CLKIN16: JP85.3 SJ51.2 U17.1
CLKIN17: JP90.3 SJ54.2 U18.1
CLKIN18: JP95.3 SJ57.2 U19.1
CLKIN19: JP100.3 SJ60.2 U20.1
CLKIN20: JP105.3 SJ63.2 U21.1
CLKIN21: JP110.3 SJ66.2 U22.1
CLKIN22: JP115.3 SJ69.2 U23.1
CLKIN23: JP120.3 SJ72.2 U24.1
FSYNC: JP6.7 SJ3.2 U1.11
FSYNC1: JP10.7 SJ5.2 U2.11
FSYNC2: JP15.7 SJ8.2 U3.11
FSYNC3: JP20.7 SJ11.2 U4.11
FSYNC4: JP25.7 SJ14.2 U5.11
FSYNC5: JP30.7 SJ17.2 U6.11
FSYNC6: JP35.7 SJ20.2 U7.11
FSYNC7: JP40.7 SJ23.2 U8.11
FSYNC8: JP45.7 SJ26.2 U9.11
FSYNC9: JP50.7 SJ29.2 U10.11
FSYNC10: JP55.7 SJ32.2 U11.11
FSYNC11: JP60.7 SJ35.2 U12.11
FSYNC12: JP65.7 SJ38.2 U13.11
FSYNC13: JP70.7 SJ41.2 U14.11
FSYNC14: JP75.7 SJ44.2 U15.11
FSYNC15: JP80.7 SJ47.2 U16.11
FSYNC16: JP85.7 SJ50.2 U17.11
FSYNC17: JP90.7 SJ53.2 U18.11
FSYNC18: JP95.7 SJ56.2 U19.11
FSYNC19: JP100.7 SJ59.2 U20.11
FSYNC20: JP105.7 SJ62.2 U21.11
FSYNC21: JP110.7 SJ65.2 U22.11
FSYNC22: JP115.7 SJ68.2 U23.11
FSYNC23: JP120.7 SJ71.2 U24.11
GND: C1.2 C2.2 C3.2 C4.2 JP6.9 SJ1.3 SJ2.1 SJ3.1 U1.18
GND1: C5.2 C6.2 C7.2 C8.2 JP10.9 SJ4.3 SJ5.1 SJ6.1 U2.18
GND2: C9.2 C10.2 C11.2 C12.2 JP15.9 SJ7.3 SJ8.1 SJ9.1 U3.18
GND3: C13.2 C14.2 C15.2 C16.2 JP20.9 SJ10.3 SJ11.1 SJ12.1 U4.18
GND4: C17.2 C18.2 C19.2 C20.2 JP25.9 SJ13.3 SJ14.1 SJ15.1 U5.18
GND5: C21.2 C22.2 C23.2 C24.2 JP30.9 SJ16.3 SJ17.1 SJ18.1 U6.18
GND6: C25.2 C26.2 C27.2 C28.2 JP35.9 SJ19.3 SJ20.1 SJ21.1 U7.18
GND7: C29.2 C30.2 C31.2 C32.2 JP40.9 SJ22.3 SJ23.1 SJ24.1 U8.18
GND8: C33.2 C34.2 C35.2 C36.2 JP45.9 SJ25.3 SJ26.1 SJ27.1 U9.18
GND9: C37.2 C38.2 C39.2 C40.2 JP50.9 SJ28.3 SJ29.1 SJ30.1 U10.18
GND10: C41.2 C42.2 C43.2 C44.2 JP55.9 SJ31.3 SJ32.1 SJ33.1 U11.18
GND11: C45.2 C46.2 C47.2 C48.2 JP60.9 SJ34.3 SJ35.1 SJ36.1 U12.18
GND12: C49.2 C50.2 C51.2 C52.2 JP65.9 SJ37.3 SJ38.1 SJ39.1 U13.18
GND13: C53.2 C54.2 C55.2 C56.2 JP70.9 SJ40.3 SJ41.1 SJ42.1 U14.18
GND14: C57.2 C58.2 C59.2 C60.2 JP75.9 SJ43.3 SJ44.1 SJ45.1 U15.18
GND15: C61.2 C62.2 C63.2 C64.2 JP80.9 SJ46.3 SJ47.1 SJ48.1 U16.18
GND16: C65.2 C66.2 C67.2 C68.2 JP85.9 SJ49.3 SJ50.1 SJ51.1 U17.18
GND17: C69.2 C70.2 C71.2 C72.2 JP90.9 SJ52.3 SJ53.1 SJ54.1 U18.18
GND18: C73.2 C74.2 C75.2 C76.2 JP95.9 SJ55.3 SJ56.1 SJ57.1 U19.18
GND19: C77.2 C78.2 C79.2 C80.2 JP100.9 SJ58.3 SJ59.1 SJ60.1 U20.18
GND20: C81.2 C82.2 C83.2 C84.2 JP105.9 SJ61.3 SJ62.1 SJ63.1 U21.18
GND21: C85.2 C86.2 C87.2 C88.2 JP110.9 SJ64.3 SJ65.1 SJ66.1 U22.18
GND22: C89.2 C90.2 C91.2 C92.2 JP115.9 SJ67.3 SJ68.1 SJ69.1 U23.18
GND23: C93.2 C94.2 C95.2 C96.2 JP120.9 SJ70.3 SJ71.1 SJ72.1 U24.18
INT: JP6.8 U1.12
INT1: JP10.8 U2.12
INT2: JP15.8 U3.12
INT3: JP20.8 U4.12
INT4: JP25.8 U5.12
INT5: JP30.8 U6.12
INT6: JP35.8 U7.12
INT7: JP40.8 U8.12
INT8: JP45.8 U9.12
INT9: JP50.8 U10.12
INT10: JP55.8 U11.12
INT11: JP60.8 U12.12
INT12: JP65.8 U13.12
INT13: JP70.8 U14.12
INT14: JP75.8 U15.12
INT15: JP80.8 U16.12
INT16: JP85.8 U17.12
INT17: JP90.8 U18.12
INT18: JP95.8 U19.12
INT19: JP100.8 U20.12
INT20: JP105.8 U21.12
INT21: JP110.8 U22.12
INT22: JP115.8 U23.12
INT23: JP120.8 U24.12
N$1: C6.1 U2.20
N$2: SJ1.2 U1.9
N$3: C2.1 U1.20
N$4: C5.1 U2.10
N$5: C1.1 U1.10
N$6: SJ4.2 U2.9
N$7: C10.1 U3.20
N$8: C9.1 U3.10
N$9: SJ7.2 U3.9
N$10: C14.1 U4.20
N$11: C13.1 U4.10
N$12: SJ10.2 U4.9
N$13: C18.1 U5.20
N$14: C17.1 U5.10
N$15: SJ13.2 U5.9
N$16: C22.1 U6.20
N$17: C21.1 U6.10
N$18: SJ16.2 U6.9
N$19: C26.1 U7.20
N$20: C25.1 U7.10
N$21: SJ19.2 U7.9
N$22: C30.1 U8.20
N$23: C29.1 U8.10
N$24: SJ22.2 U8.9
N$25: C34.1 U9.20
N$26: C33.1 U9.10
N$27: SJ25.2 U9.9
N$28: C38.1 U10.20
N$29: C37.1 U10.10
N$30: SJ28.2 U10.9
N$31: C42.1 U11.20
N$32: C41.1 U11.10
N$33: SJ31.2 U11.9
N$34: C46.1 U12.20
N$35: C45.1 U12.10
N$36: SJ34.2 U12.9
N$37: C50.1 U13.20
N$38: C49.1 U13.10
N$39: SJ37.2 U13.9
N$40: C54.1 U14.20
N$41: C53.1 U14.10
N$42: SJ40.2 U14.9
N$43: C58.1 U15.20
N$44: C57.1 U15.10
N$45: SJ43.2 U15.9
N$46: C62.1 U16.20
N$47: C61.1 U16.10
N$48: SJ46.2 U16.9
N$49: C66.1 U17.20
N$50: C65.1 U17.10
N$51: SJ49.2 U17.9
N$52: C70.1 U18.20
N$53: C69.1 U18.10
N$54: SJ52.2 U18.9
N$55: C74.1 U19.20
N$56: C73.1 U19.10
N$57: SJ55.2 U19.9
N$58: C78.1 U20.20
N$59: C77.1 U20.10
N$60: SJ58.2 U20.9
N$61: C82.1 U21.20
N$62: C81.1 U21.10
N$63: SJ61.2 U21.9
N$64: C86.1 U22.20
N$65: C85.1 U22.10
N$66: SJ64.2 U22.9
N$67: C90.1 U23.20
N$68: C89.1 U23.10
N$69: SJ67.2 U23.9
N$70: C94.1 U24.20
N$71: C93.1 U24.10
N$72: SJ70.2 U24.9
SCL: JP6.6 R1.1 U1.23
SCL1: JP10.6 R3.1 U2.23
SCL2: JP15.6 R5.1 U3.23
SCL3: JP20.6 R7.1 U4.23
SCL4: JP25.6 R9.1 U5.23
SCL5: JP30.6 R11.1 U6.23
SCL6: JP35.6 R13.1 U7.23
SCL7: JP40.6 R15.1 U8.23
SCL8: JP45.6 R17.1 U9.23
SCL9: JP50.6 R19.1 U10.23
SCL10: JP55.6 R21.1 U11.23
SCL11: JP60.6 R23.1 U12.23
SCL12: JP65.6 R25.1 U13.23
SCL13: JP70.6 R27.1 U14.23
SCL14: JP75.6 R29.1 U15.23
SCL15: JP80.6 R31.1 U16.23
SCL16: JP85.6 R33.1 U17.23
SCL17: JP90.6 R35.1 U18.23
SCL18: JP95.6 R37.1 U19.23
SCL19: JP100.6 R39.1 U20.23
SCL20: JP105.6 R41.1 U21.23
SCL21: JP110.6 R43.1 U22.23
SCL22: JP115.6 R45.1 U23.23
SCL23: JP120.6 R47.1 U24.23
SDA: JP6.5 R2.1 U1.24
SDA1: JP10.5 R4.1 U2.24
SDA2: JP15.5 R6.1 U3.24
SDA3: JP20.5 R8.1 U4.24
SDA4: JP25.5 R10.1 U5.24
SDA5: JP30.5 R12.1 U6.24
SDA6: JP35.5 R14.1 U7.24
SDA7: JP40.5 R16.1 U8.24
SDA8: JP45.5 R18.1 U9.24
SDA9: JP50.5 R20.1 U10.24
SDA10: JP55.5 R22.1 U11.24
SDA11: JP60.5 R24.1 U12.24
SDA12: JP65.5 R26.1 U13.24
SDA13: JP70.5 R28.1 U14.24
SDA14: JP75.5 R30.1 U15.24
SDA15: JP80.5 R32.1 U16.24
SDA16: JP85.5 R34.1 U17.24
SDA17: JP90.5 R36.1 U18.24
SDA18: JP95.5 R38.1 U19.24
SDA19: JP100.5 R40.1 U20.24
SDA20: JP105.5 R42.1 U21.24
SDA21: JP110.5 R44.1 U22.24
SDA22: JP115.5 R46.1 U23.24
SDA23: JP120.5 R48.1 U24.24
VCC: C3.1 JP6.10 R1.2 R2.2 SJ1.1 U1.13
VCC1: C7.1 JP10.10 R3.2 R4.2 SJ4.1 U2.13
VCC2: C11.1 JP15.10 R5.2 R6.2 SJ7.1 U3.13
VCC3: C15.1 JP20.10 R7.2 R8.2 SJ10.1 U4.13
VCC4: C19.1 JP25.10 R9.2 R10.2 SJ13.1 U5.13
VCC5: C23.1 JP30.10 R11.2 R12.2 SJ16.1 U6.13
VCC6: C27.1 JP35.10 R13.2 R14.2 SJ19.1 U7.13
VCC7: C31.1 JP40.10 R15.2 R16.2 SJ22.1 U8.13
VCC8: C35.1 JP45.10 R17.2 R18.2 SJ25.1 U9.13
VCC9: C39.1 JP50.10 R19.2 R20.2 SJ28.1 U10.13
VCC10: C43.1 JP55.10 R21.2 R22.2 SJ31.1 U11.13
VCC11: C47.1 JP60.10 R23.2 R24.2 SJ34.1 U12.13
VCC12: C51.1 JP65.10 R25.2 R26.2 SJ37.1 U13.13
VCC13: C55.1 JP70.10 R27.2 R28.2 SJ40.1 U14.13
VCC14: C59.1 JP75.10 R29.2 R30.2 SJ43.1 U15.13
VCC15: C63.1 JP80.10 R31.2 R32.2 SJ46.1 U16.13
VCC16: C67.1 JP85.10 R33.2 R34.2 SJ49.1 U17.13
VCC17: C71.1 JP90.10 R35.2 R36.2 SJ52.1 U18.13
VCC18: C75.1 JP95.10 R37.2 R38.2 SJ55.1 U19.13
VCC19: C79.1 JP100.10 R39.2 R40.2 SJ58.1 U20.13
VCC20: C83.1 JP105.10 R41.2 R42.2 SJ61.1 U21.13
VCC21: C87.1 JP110.10 R43.2 R44.2 SJ64.1 U22.13
VCC22: C91.1 JP115.10 R45.2 R46.2 SJ67.1 U23.13
VCC23: C95.1 JP120.10 R47.2 R48.2 SJ70.1 U24.13
VIO: C4.1 JP6.4 U1.8
VIO1: C8.1 JP10.4 U2.8
VIO2: C12.1 JP15.4 U3.8
VIO3: C16.1 JP20.4 U4.8
VIO4: C20.1 JP25.4 U5.8
VIO5: C24.1 JP30.4 U6.8
VIO6: C28.1 JP35.4 U7.8
VIO7: C32.1 JP40.4 U8.8
VIO8: C36.1 JP45.4 U9.8
VIO9: C40.1 JP50.4 U10.8
VIO10: C44.1 JP55.4 U11.8
VIO11: C48.1 JP60.4 U12.8
VIO12: C52.1 JP65.4 U13.8
VIO13: C56.1 JP70.4 U14.8
VIO14: C60.1 JP75.4 U15.8
VIO15: C64.1 JP80.4 U16.8
VIO16: C68.1 JP85.4 U17.8
VIO17: C72.1 JP90.4 U18.8
VIO18: C76.1 JP95.4 U19.8
VIO19: C80.1 JP100.4 U20.8
VIO20: C84.1 JP105.4 U21.8
VIO21: C88.1 JP110.4 U22.8
VIO22: C92.1 JP115.4 U23.8
VIO23: C96.1 JP120.4 U24.8